# Altium PCB 多通道.PcbDoc (part 2 of 4)
Units mm, origin at the board's own origin, x right, y up, seen from the top; angles counter-clockwise.
Board outline 145 x 32 mm, 2 copper layers (Top Layer, Bottom Layer); 175 components, 157 nets, 554 pads, 195 vias.
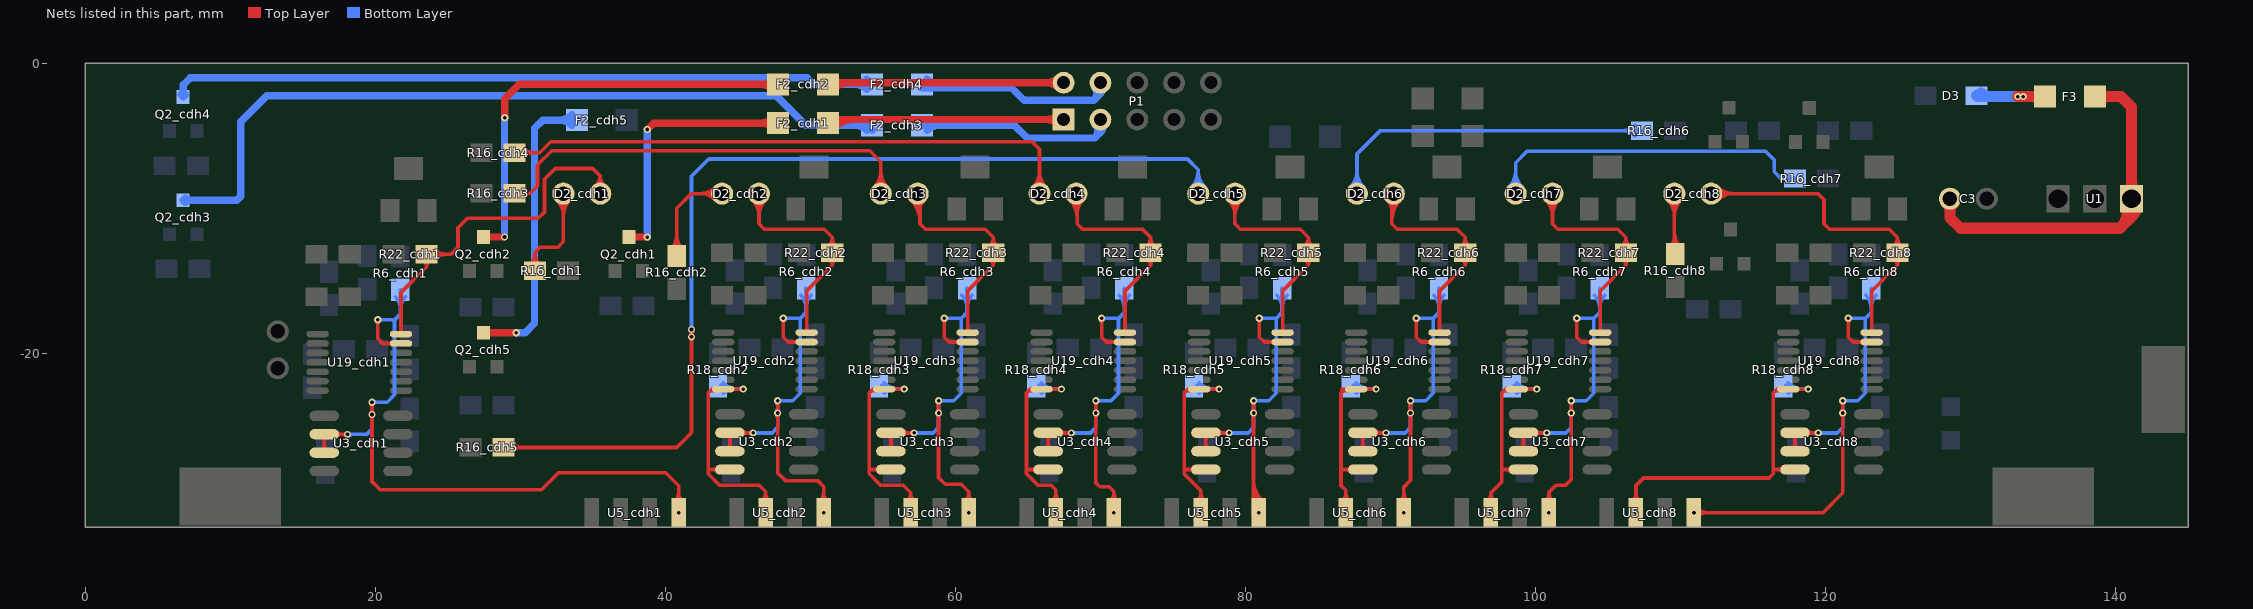
[diagram p2: the nets of this part, all layers, seen from the top]

## Via types
v1: diameter 0.5, hole 0.25, Top Layer to Bottom Layer, 192 vias
v2: diameter 3.1, hole 3.1, Top Layer to Bottom Layer, 3 vias

## Nets (pads, with @x,y where several pads share a name; then routed paths per layer and width w, separated by ;. In a path a pad name is that pad's centre, name@x,y a point inside that pad or via, vN(x,y) a via of type N, cw(c..) or ccw(c..) an arc to the next point about the centre after c; other vN are vias at no path point) (continued)
H1_OUT2_cdh2: R18_cdh2.1 U3_cdh2.4 U5_cdh2.2 U19_cdh2.7 | length 24.6
  Top Layer w0.254: 43.036,-28.016 U3_cdh2.4@44.451,-28.016 ; U19_cdh2.7@43.369,-22.542 ccw(c43.202,-22.71) 43.202,-22.473 ccw(c43.202,-22.237) U19_cdh2.7@43.369,-22.404 ; U19_cdh2.7@43.423,-22.57 ccw(c43.335,-23.108) 42.949,-22.723 ; U3_cdh2.4@43.629,-28.178 ccw(c43.238,-28.568) 43.238,-28.016 ccw(c43.238,-27.464) U3_cdh2.4@43.629,-27.855 ; U19_cdh2.7@44.608,-22.542 cw(c44.775,-22.71) 44.775,-22.473 cw(c44.775,-22.237) U19_cdh2.7@44.608,-22.404 ; 45.054,-22.473 ccw(c45.054,-22.161) v1@45.275,-22.382 ; 45.076,-22.473 cw(c45.076,-22.754) v1@45.275,-22.556 ; v1(45.362,-22.469) 45.358,-22.473 U19_cdh2.7@43.989,-22.473 43.199,-22.473 42.949,-22.723 ; U5_cdh2.2@46.653,-30.224 ccw(c46.016,-29.587) 46.917,-29.587 ccw(c47.817,-29.587) U5_cdh2.2@47.181,-30.224 ; U5_cdh2.2@46.83,-30.901 ccw(c46.62,-30.691) 46.917,-30.691 ccw(c47.214,-30.691) U5_cdh2.2@47.004,-30.901 ; v1(46.917,-30.988) 46.917,-29.55 46.466,-29.099 43.738,-29.099 42.949,-28.311 42.949,-22.723
  Bottom Layer w0.254: R18_cdh2.1@43.81,-22.223 ccw(c44.403,-21.631) 44.403,-22.469 ; R18_cdh2.1@43.99,-22.762 cw(c44.698,-23.47) 44.698,-22.469 ; R18_cdh2.1@43.99,-22.044 ccw(c45.016,-21.018) 45.016,-22.469 ; R18_cdh2.1@44.085,-22.63 cw(c44.346,-22.76) 44.346,-22.469 ; R18_cdh2.1@44.127,-22.293 ccw(c44.346,-22.244) 44.346,-22.469 ; v1@45.275,-22.556 ccw(c45.065,-22.766) 45.065,-22.469 ccw(c45.065,-22.172) v1@45.275,-22.382 ; v1(45.362,-22.469) 44.346,-22.469
H1_OUT2_cdh3: R18_cdh3.1 U3_cdh3.4 U5_cdh3.2 U19_cdh3.7 | length 23.4
  Top Layer w0.254: 54.136,-28.016 U3_cdh3.4@55.55,-28.016 ; U19_cdh3.7@54.469,-22.542 ccw(c54.302,-22.71) 54.302,-22.473 ccw(c54.302,-22.237) U19_cdh3.7@54.469,-22.404 ; U19_cdh3.7@54.523,-22.57 ccw(c54.435,-23.108) 54.049,-22.723 ; U3_cdh3.4@54.728,-28.178 ccw(c54.338,-28.568) 54.338,-28.016 ccw(c54.338,-27.464) U3_cdh3.4@54.728,-27.855 ; U19_cdh3.7@55.708,-22.542 cw(c55.875,-22.71) 55.875,-22.473 cw(c55.875,-22.237) U19_cdh3.7@55.708,-22.404 ; 56.154,-22.473 ccw(c56.154,-22.161) v1@56.375,-22.382 ; 56.176,-22.473 cw(c56.176,-22.754) v1@56.375,-22.556 ; v1(56.462,-22.469) 56.457,-22.473 U19_cdh3.7@55.088,-22.473 54.298,-22.473 54.049,-22.723 ; U5_cdh3.2@56.66,-30.218 ccw(c56.09,-29.618) 56.917,-29.618 ; U5_cdh3.2@56.83,-30.901 ccw(c56.62,-30.691) 56.917,-30.691 ccw(c57.214,-30.691) U5_cdh3.2@57.004,-30.901 ; v1(56.917,-30.988) 56.917,-29.618 ; U5_cdh3.2@57.174,-30.218 cw(c57.744,-29.618) 56.917,-29.618 ; 54.049,-22.723 54.049,-28.311 54.837,-29.099 56.398,-29.099 56.917,-29.618
  Bottom Layer w0.254: R18_cdh3.1@54.91,-22.223 ccw(c55.503,-21.631) 55.503,-22.469 ; R18_cdh3.1@55.09,-22.762 cw(c55.798,-23.47) 55.798,-22.469 ; R18_cdh3.1@55.09,-22.044 ccw(c56.116,-21.018) 56.116,-22.469 ; R18_cdh3.1@55.185,-22.63 cw(c55.446,-22.76) 55.446,-22.469 ; R18_cdh3.1@55.226,-22.293 ccw(c55.446,-22.244) 55.446,-22.469 ; v1@56.375,-22.556 ccw(c56.165,-22.766) 56.165,-22.469 ccw(c56.165,-22.172) v1@56.375,-22.382 ; v1(56.462,-22.469) 55.446,-22.469
H1_OUT2_cdh4: R18_cdh4.1 U3_cdh4.4 U5_cdh4.2 U19_cdh4.7 | length 22.7
  Top Layer w0.254: 64.981,-28.016 U3_cdh4.4@66.396,-28.016 ; U19_cdh4.7@65.315,-22.542 ccw(c65.148,-22.71) 65.148,-22.473 ccw(c65.148,-22.237) U19_cdh4.7@65.315,-22.404 ; U19_cdh4.7@65.368,-22.57 ccw(c65.281,-23.108) 64.895,-22.723 ; U3_cdh4.4@65.574,-28.178 ccw(c65.184,-28.568) 65.184,-28.016 ccw(c65.184,-27.464) U3_cdh4.4@65.574,-27.855 ; U19_cdh4.7@66.553,-22.542 cw(c66.721,-22.71) 66.721,-22.473 cw(c66.721,-22.237) U19_cdh4.7@66.553,-22.404 ; U5_cdh4.2@66.653,-30.224 ccw(c66.016,-29.587) 66.917,-29.587 ccw(c67.817,-29.587) U5_cdh4.2@67.181,-30.224 ; U5_cdh4.2@66.83,-30.901 ccw(c66.62,-30.691) 66.917,-30.691 ccw(c67.214,-30.691) U5_cdh4.2@67.004,-30.901 ; v1(66.917,-30.988) 66.917,-29.408 66.608,-29.099 65.683,-29.099 64.895,-28.311 64.895,-22.723 ; 67,-22.473 ccw(c67,-22.161) v1@67.221,-22.382 ; 67.022,-22.473 cw(c67.022,-22.754) v1@67.221,-22.556 ; v1(67.308,-22.469) 67.303,-22.473 U19_cdh4.7@65.934,-22.473 65.144,-22.473 64.895,-22.723
  Bottom Layer w0.254: R18_cdh4.1@65.756,-22.223 ccw(c66.348,-21.631) 66.348,-22.469 ; R18_cdh4.1@65.936,-22.762 cw(c66.644,-23.47) 66.644,-22.469 ; R18_cdh4.1@65.936,-22.044 ccw(c66.962,-21.018) 66.962,-22.469 ; R18_cdh4.1@66.031,-22.63 cw(c66.292,-22.76) 66.292,-22.469 ; R18_cdh4.1@66.072,-22.293 ccw(c66.292,-22.244) 66.292,-22.469 ; v1@67.221,-22.556 ccw(c67.011,-22.766) 67.011,-22.469 ccw(c67.011,-22.172) v1@67.221,-22.382 ; v1(67.308,-22.469) 66.292,-22.469
H1_OUT2_cdh5: R18_cdh5.1 U3_cdh5.4 U5_cdh5.2 U19_cdh5.7 | length 21.8
  Top Layer w0.254: 75.853,-28.016 U3_cdh5.4@77.267,-28.016 ; U19_cdh5.7@76.186,-22.542 ccw(c76.019,-22.71) 76.019,-22.473 ccw(c76.019,-22.237) U19_cdh5.7@76.186,-22.404 ; U19_cdh5.7@76.24,-22.57 ccw(c76.152,-23.108) 75.766,-22.723 ; U3_cdh5.4@76.445,-28.178 ccw(c76.055,-28.568) 76.055,-28.016 ccw(c76.055,-27.464) U3_cdh5.4@76.445,-27.855 ; U5_cdh5.2@76.653,-30.224 ccw(c76.017,-29.587) 76.917,-29.587 ccw(c77.817,-29.587) U5_cdh5.2@77.181,-30.224 ; U5_cdh5.2@76.83,-30.901 ccw(c76.62,-30.691) 76.917,-30.691 ccw(c77.214,-30.691) U5_cdh5.2@77.004,-30.901 ; v1(76.917,-30.988) 76.917,-29.462 75.766,-28.311 75.766,-22.723 ; U19_cdh5.7@77.425,-22.542 cw(c77.592,-22.71) 77.592,-22.473 cw(c77.592,-22.237) U19_cdh5.7@77.425,-22.404 ; 77.871,-22.473 ccw(c77.871,-22.161) v1@78.092,-22.382 ; 77.893,-22.473 cw(c77.893,-22.754) v1@78.092,-22.556 ; v1(78.179,-22.469) 78.174,-22.473 U19_cdh5.7@76.805,-22.473 76.015,-22.473 75.766,-22.723
  Bottom Layer w0.254: R18_cdh5.1@76.627,-22.223 ccw(c77.22,-21.631) 77.22,-22.469 ; R18_cdh5.1@76.807,-22.762 cw(c77.515,-23.47) 77.515,-22.469 ; R18_cdh5.1@76.807,-22.044 ccw(c77.833,-21.018) 77.833,-22.469 ; R18_cdh5.1@76.902,-22.63 cw(c77.163,-22.76) 77.163,-22.469 ; R18_cdh5.1@76.943,-22.293 ccw(c77.163,-22.244) 77.163,-22.469 ; v1@78.092,-22.556 ccw(c77.882,-22.766) 77.882,-22.469 ccw(c77.882,-22.172) v1@78.092,-22.382 ; v1(78.179,-22.469) 77.163,-22.469
H1_OUT2_cdh6: R18_cdh6.1 U3_cdh6.4 U5_cdh6.2 U19_cdh6.7 | length 22.4
  Top Layer w0.254: 86.639,-22.473 86.836,-22.473 ; U5_cdh6.2@86.653,-30.224 ccw(c86.016,-29.587) 86.917,-29.587 ccw(c87.817,-29.587) U5_cdh6.2@87.181,-30.224 ; 86.673,-28.016 U3_cdh6.4@88.088,-28.016 ; U5_cdh6.2@86.83,-30.901 ccw(c86.62,-30.691) 86.917,-30.691 ccw(c87.214,-30.691) U5_cdh6.2@87.004,-30.901 ; v1(86.917,-30.988) 86.917,-29.443 86.586,-29.113 86.586,-22.723 ; U19_cdh6.7@87.06,-22.57 ccw(c86.972,-23.108) 86.586,-22.723 ; U3_cdh6.4@87.266,-28.178 ccw(c86.876,-28.568) 86.876,-28.016 ccw(c86.876,-27.464) U3_cdh6.4@87.266,-27.855 ; U19_cdh6.7@88.245,-22.542 cw(c88.412,-22.71) 88.412,-22.473 cw(c88.412,-22.237) U19_cdh6.7@88.245,-22.404 ; 88.691,-22.473 ccw(c88.691,-22.161) v1@88.912,-22.382 ; 88.714,-22.473 cw(c88.714,-22.754) v1@88.912,-22.556 ; v1(88.999,-22.469) 88.995,-22.473 U19_cdh6.7@87.626,-22.473 86.836,-22.473 ; 86.586,-22.723 86.836,-22.473 ; 86.839,-22.473 cw(c86.839,-22.71) U19_cdh6.7@87.007,-22.542 ; 86.839,-22.473 ccw(c86.839,-22.237) U19_cdh6.7@87.007,-22.404 ; 86.839,-22.473 cw(c86.839,-22.71) U19_cdh6.7@87.007,-22.542 ; 86.839,-22.473 ccw(c86.839,-22.237) U19_cdh6.7@87.007,-22.404 ; 86.839,-22.473 cw(c86.839,-22.71) U19_cdh6.7@87.007,-22.542 ; 86.839,-22.473 ccw(c86.839,-22.237) U19_cdh6.7@87.007,-22.404
  Bottom Layer w0.254: R18_cdh6.1@87.448,-22.223 ccw(c88.04,-21.631) 88.04,-22.469 ; R18_cdh6.1@87.627,-22.762 cw(c88.336,-23.47) 88.336,-22.469 ; R18_cdh6.1@87.627,-22.044 ccw(c88.653,-21.018) 88.653,-22.469 ; R18_cdh6.1@87.722,-22.63 cw(c87.983,-22.76) 87.983,-22.469 ; R18_cdh6.1@87.764,-22.293 ccw(c87.983,-22.244) 87.983,-22.469 ; v1@88.912,-22.556 ccw(c88.702,-22.766) 88.702,-22.469 ccw(c88.702,-22.172) v1@88.912,-22.382 ; v1(88.999,-22.469) 87.983,-22.469
H1_OUT2_cdh7: R18_cdh7.1 U3_cdh7.4 U5_cdh7.2 U19_cdh7.7 | length 21.6
  Top Layer w0.254: U5_cdh7.2@96.66,-30.218 ccw(c96.092,-29.619) 96.917,-29.619 ; U5_cdh7.2@96.83,-30.901 ccw(c96.62,-30.691) 96.917,-30.691 ccw(c97.214,-30.691) U5_cdh7.2@97.004,-30.901 ; v1(96.917,-30.988) 96.917,-29.619 ; U5_cdh7.2@97.174,-30.218 cw(c97.742,-29.619) 96.917,-29.619 ; 97.747,-28.016 U3_cdh7.4@99.162,-28.016 ; U19_cdh7.7@98.081,-22.542 ccw(c97.914,-22.71) 97.914,-22.473 ccw(c97.914,-22.237) U19_cdh7.7@98.081,-22.404 ; U19_cdh7.7@98.134,-22.57 ccw(c98.047,-23.108) 97.661,-22.723 ; U3_cdh7.4@98.34,-28.178 ccw(c97.95,-28.568) 97.95,-28.016 ccw(c97.95,-27.464) U3_cdh7.4@98.34,-27.855 ; U19_cdh7.7@99.319,-22.542 cw(c99.487,-22.71) 99.487,-22.473 cw(c99.487,-22.237) U19_cdh7.7@99.319,-22.404 ; 99.766,-22.473 ccw(c99.766,-22.161) v1@99.987,-22.382 ; 99.788,-22.473 cw(c99.788,-22.754) v1@99.987,-22.556 ; v1(100.074,-22.469) 100.069,-22.473 U19_cdh7.7@98.7,-22.473 97.91,-22.473 97.661,-22.723 ; 96.917,-29.619 97.661,-28.876 97.661,-28.311 97.661,-22.723
  Bottom Layer w0.254: R18_cdh7.1@98.522,-22.223 ccw(c99.114,-21.631) 99.114,-22.469 ; R18_cdh7.1@98.702,-22.762 cw(c99.41,-23.47) 99.41,-22.469 ; R18_cdh7.1@98.702,-22.044 ccw(c99.728,-21.018) 99.728,-22.469 ; R18_cdh7.1@98.797,-22.63 cw(c99.058,-22.76) 99.058,-22.469 ; R18_cdh7.1@98.838,-22.293 ccw(c99.058,-22.244) 99.058,-22.469 ; v1@99.987,-22.556 ccw(c99.777,-22.766) 99.777,-22.469 ccw(c99.777,-22.172) v1@99.987,-22.382 ; v1(100.074,-22.469) 99.058,-22.469
H1_OUT2_cdh8: R18_cdh8.1 U3_cdh8.4 U5_cdh8.2 U19_cdh8.7 | length 30.4
  Top Layer w0.254: U5_cdh8.2@106.653,-30.224 ccw(c106.016,-29.587) 106.917,-29.587 ccw(c107.817,-29.587) U5_cdh8.2@107.181,-30.224 ; U5_cdh8.2@106.83,-30.901 ccw(c106.62,-30.691) 106.917,-30.691 ccw(c107.214,-30.691) U5_cdh8.2@107.004,-30.901 ; v1(106.917,-30.988) 106.917,-29.119 107.436,-28.6 116.091,-28.6 116.381,-28.311 116.381,-22.723 ; 116.467,-28.016 U3_cdh8.4@117.882,-28.016 ; U19_cdh8.7@116.801,-22.542 ccw(c116.633,-22.71) 116.633,-22.473 ccw(c116.633,-22.237) U19_cdh8.7@116.801,-22.404 ; U19_cdh8.7@116.854,-22.57 ccw(c116.766,-23.108) 116.381,-22.723 ; U3_cdh8.4@117.06,-28.178 ccw(c116.67,-28.568) 116.67,-28.016 ccw(c116.67,-27.464) U3_cdh8.4@117.06,-27.855 ; U19_cdh8.7@118.039,-22.542 cw(c118.207,-22.71) 118.207,-22.473 cw(c118.207,-22.237) U19_cdh8.7@118.039,-22.404 ; 118.486,-22.473 ccw(c118.486,-22.161) v1@118.707,-22.382 ; 118.508,-22.473 cw(c118.508,-22.754) v1@118.707,-22.556 ; v1(118.794,-22.469) 118.789,-22.473 U19_cdh8.7@117.42,-22.473 116.63,-22.473 116.381,-22.723
  Bottom Layer w0.254: R18_cdh8.1@117.242,-22.223 ccw(c117.834,-21.631) 117.834,-22.469 ; R18_cdh8.1@117.421,-22.762 cw(c118.13,-23.47) 118.13,-22.469 ; R18_cdh8.1@117.421,-22.044 ccw(c118.447,-21.018) 118.447,-22.469 ; R18_cdh8.1@117.517,-22.63 cw(c117.778,-22.76) 117.778,-22.469 ; R18_cdh8.1@117.558,-22.293 ccw(c117.778,-22.244) 117.778,-22.469 ; v1@118.707,-22.556 ccw(c118.497,-22.766) 118.497,-22.469 ccw(c118.497,-22.172) v1@118.707,-22.382 ; v1(118.794,-22.469) 117.778,-22.469
H1_OUT4_cdh1: R6_cdh1.1 U3_cdh1.2 U3_cdh1.3 U5_cdh1.4 U19_cdh1.13 | length 61.4
  Top Layer w0.254: U3_cdh1.3@16.324,-26.686 ccw(c15.933,-26.296) 16.485,-26.296 ccw(c17.037,-26.296) U3_cdh1.3@16.647,-26.686 ; U3_cdh1.2@16.324,-25.739 cw(c15.933,-26.13) 16.485,-26.13 cw(c17.037,-26.13) U3_cdh1.2@16.647,-25.739 ; U3_cdh1.3@16.485,-26.848 U3_cdh1.2@16.485,-25.578 16.5,-25.593 v1(18.083,-25.593) ; U3_cdh1.2@17.307,-25.739 cw(c17.661,-26.093) 17.661,-25.593 ; U3_cdh1.2@17.307,-25.416 ccw(c17.734,-24.99) 17.734,-25.593 ; v1@17.996,-25.68 ccw(c17.786,-25.89) 17.786,-25.593 ccw(c17.786,-25.296) v1@17.996,-25.506 ; v1@19.685,-24.308 cw(c19.475,-24.518) 19.772,-24.518 cw(c20.069,-24.518) v1@19.859,-24.308 ; v1@19.685,-24.134 ccw(c19.475,-23.924) 19.772,-23.924 ccw(c20.069,-23.924) v1@19.859,-24.134 ; v1@19.685,-23.457 cw(c19.475,-23.667) 19.772,-23.667 cw(c20.069,-23.667) v1@19.859,-23.457 ; v1(19.772,-23.37) v1(19.772,-24.221) 19.772,-28.465 19.772,-28.846 20.339,-29.413 31.466,-29.413 32.635,-28.245 40.024,-28.245 40.917,-29.138 v1(40.917,-30.988) ; v1@20.078,-17.78 cw(c19.868,-17.99) 20.165,-17.99 cw(c20.462,-17.99) v1@20.252,-17.78 ; v1(20.165,-17.693) 20.165,-18.989 20.501,-19.325 U19_cdh1.13@21.773,-19.325 ; U19_cdh1.13@21.154,-19.394 ccw(c20.987,-19.561) 20.987,-19.325 ccw(c20.987,-19.088) U19_cdh1.13@21.154,-19.256 ; U5_cdh1.4@40.653,-30.224 ccw(c40.016,-29.587) 40.917,-29.587 ccw(c41.817,-29.587) U5_cdh1.4@41.181,-30.224 ; U5_cdh1.4@40.83,-30.901 ccw(c40.62,-30.691) 40.917,-30.691 ccw(c41.214,-30.691) U5_cdh1.4@41.004,-30.901
  Bottom Layer w0.254: v1(18.083,-25.593) 19.403,-25.593 19.772,-25.224 v1(19.772,-24.221) v1(19.772,-23.37) 20.82,-23.37 21.33,-22.86 21.33,-17.704 ; v1@18.17,-25.68 cw(c18.38,-25.89) 18.38,-25.593 cw(c18.38,-25.296) v1@18.17,-25.506 ; v1@19.685,-24.308 cw(c19.475,-24.518) 19.772,-24.518 cw(c20.069,-24.518) v1@19.859,-24.308 ; v1@19.685,-24.134 ccw(c19.475,-23.924) 19.772,-23.924 ccw(c20.069,-23.924) v1@19.859,-24.134 ; v1@19.685,-23.457 cw(c19.475,-23.667) 19.772,-23.667 cw(c20.069,-23.667) 19.859,-23.457 cw(c20.069,-23.667) 20.069,-23.37 cw(c20.069,-23.073) v1@19.859,-23.283 ; v1(20.165,-17.693) 21.319,-17.693 21.33,-17.704 ; v1@20.252,-17.78 cw(c20.462,-17.99) 20.462,-17.693 cw(c20.462,-17.396) v1@20.252,-17.606 ; R6_cdh1.1@21.377,-16.107 cw(c20.51,-16.974) 21.736,-16.974 cw(c22.962,-16.974) R6_cdh1.1@22.095,-16.107 ; R6_cdh1.1@21.736,-15.621 21.736,-17.297 21.33,-17.704
H1_OUT4_cdh2: R6_cdh2.1 U3_cdh2.2 U3_cdh2.3 U5_cdh2.4 U19_cdh2.13 | length 42.2
  Top Layer w0.254: U3_cdh2.3@44.289,-26.585 ccw(c43.899,-26.194) 44.451,-26.194 ccw(c45.002,-26.194) U3_cdh2.3@44.612,-26.585 ; U3_cdh2.2@44.289,-25.638 cw(c43.899,-26.028) 44.451,-26.028 cw(c45.002,-26.028) U3_cdh2.2@44.612,-25.638 ; U3_cdh2.3@44.451,-26.746 U3_cdh2.2@44.451,-25.476 44.466,-25.491 v1(46.048,-25.491) ; U3_cdh2.2@45.273,-25.638 cw(c45.627,-25.992) 45.627,-25.491 ; U3_cdh2.2@45.273,-25.315 ccw(c45.699,-24.888) 45.699,-25.491 ; v1@45.961,-25.578 ccw(c45.751,-25.788) 45.751,-25.491 ccw(c45.751,-25.194) v1@45.961,-25.404 ; v1@47.651,-24.207 cw(c47.441,-24.417) 47.738,-24.417 cw(c48.035,-24.417) v1@47.825,-24.207 ; v1@47.651,-24.033 ccw(c47.441,-23.823) 47.738,-23.823 ccw(c48.035,-23.823) v1@47.825,-24.033 ; v1@47.651,-23.355 cw(c47.441,-23.565) 47.738,-23.565 cw(c48.035,-23.565) v1@47.825,-23.355 ; v1(47.738,-23.268) v1(47.738,-24.12) 47.738,-28.237 48.279,-28.778 50.489,-28.778 50.917,-29.206 v1(50.917,-30.988) ; v1@48.044,-17.679 cw(c47.834,-17.889) 48.131,-17.889 cw(c48.428,-17.889) v1@48.218,-17.679 ; v1(48.131,-17.592) 48.131,-18.887 48.467,-19.223 U19_cdh2.13@49.739,-19.223 ; U19_cdh2.13@49.119,-19.292 ccw(c48.952,-19.46) 48.952,-19.223 ccw(c48.952,-18.987) U19_cdh2.13@49.119,-19.154 ; U5_cdh2.4@50.653,-30.224 ccw(c50.016,-29.587) 50.917,-29.587 ccw(c51.817,-29.587) U5_cdh2.4@51.181,-30.224 ; U5_cdh2.4@50.83,-30.901 ccw(c50.62,-30.691) 50.917,-30.691 ccw(c51.214,-30.691) U5_cdh2.4@51.004,-30.901
  Bottom Layer w0.254: v1(46.048,-25.491) 47.369,-25.491 47.738,-25.122 v1(47.738,-24.12) v1(47.738,-23.268) 48.785,-23.268 49.295,-22.758 49.295,-17.602 ; v1@46.135,-25.578 cw(c46.345,-25.788) 46.345,-25.491 cw(c46.345,-25.194) v1@46.135,-25.404 ; v1@47.651,-24.207 cw(c47.441,-24.417) 47.738,-24.417 cw(c48.035,-24.417) v1@47.825,-24.207 ; v1@47.651,-24.033 ccw(c47.441,-23.823) 47.738,-23.823 ccw(c48.035,-23.823) v1@47.825,-24.033 ; v1@47.651,-23.355 cw(c47.441,-23.565) 47.738,-23.565 cw(c48.035,-23.565) 47.825,-23.355 cw(c48.035,-23.565) 48.035,-23.268 cw(c48.035,-22.971) v1@47.825,-23.181 ; v1(48.131,-17.592) 49.285,-17.592 49.295,-17.602 ; v1@48.218,-17.679 cw(c48.428,-17.889) 48.428,-17.592 cw(c48.428,-17.295) v1@48.218,-17.505 ; R6_cdh2.1@49.342,-16.006 cw(c48.475,-16.873) 49.701,-16.873 cw(c50.928,-16.873) R6_cdh2.1@50.061,-16.006 ; R6_cdh2.1@49.701,-15.519 49.701,-17.196 49.295,-17.602
H1_OUT4_cdh3: R6_cdh3.1 U3_cdh3.2 U3_cdh3.3 U5_cdh3.4 U19_cdh3.13 | length 41.1
  Top Layer w0.254: U3_cdh3.3@55.389,-26.585 ccw(c54.999,-26.194) 55.55,-26.194 ccw(c56.102,-26.194) U3_cdh3.3@55.712,-26.585 ; U3_cdh3.2@55.389,-25.638 cw(c54.999,-26.028) 55.55,-26.028 cw(c56.102,-26.028) U3_cdh3.2@55.712,-25.638 ; U3_cdh3.3@55.55,-26.746 U3_cdh3.2@55.55,-25.476 55.565,-25.491 v1(57.148,-25.491) ; U3_cdh3.2@56.372,-25.638 cw(c56.726,-25.992) 56.726,-25.491 ; U3_cdh3.2@56.372,-25.315 ccw(c56.799,-24.888) 56.799,-25.491 ; v1@57.061,-25.578 ccw(c56.851,-25.788) 56.851,-25.491 ccw(c56.851,-25.194) v1@57.061,-25.404 ; v1@58.75,-24.207 cw(c58.54,-24.417) 58.837,-24.417 cw(c59.134,-24.417) v1@58.924,-24.207 ; v1@58.75,-24.033 ccw(c58.54,-23.823) 58.837,-23.823 ccw(c59.134,-23.823) v1@58.924,-24.033 ; v1@58.75,-23.355 cw(c58.54,-23.565) 58.837,-23.565 cw(c59.134,-23.565) v1@58.924,-23.355 ; v1(58.837,-23.268) v1(58.837,-24.12) 58.837,-28.567 59.303,-29.032 60.395,-29.032 60.917,-29.554 v1(60.917,-30.988) ; v1@59.144,-17.679 cw(c58.934,-17.889) 59.231,-17.889 cw(c59.528,-17.889) v1@59.318,-17.679 ; v1(59.231,-17.592) 59.231,-18.887 59.567,-19.223 U19_cdh3.13@60.838,-19.223 ; U19_cdh3.13@60.219,-19.292 ccw(c60.052,-19.46) 60.052,-19.223 ccw(c60.052,-18.987) U19_cdh3.13@60.219,-19.154 ; U5_cdh3.4@60.653,-30.224 ccw(c60.016,-29.587) 60.917,-29.587 ccw(c61.817,-29.587) U5_cdh3.4@61.181,-30.224 ; U5_cdh3.4@60.83,-30.901 ccw(c60.62,-30.691) 60.917,-30.691 ccw(c61.214,-30.691) U5_cdh3.4@61.004,-30.901
  Bottom Layer w0.254: v1(57.148,-25.491) 58.469,-25.491 58.837,-25.122 v1(58.837,-24.12) v1(58.837,-23.268) 59.885,-23.268 60.395,-22.758 60.395,-17.602 ; v1@57.235,-25.578 cw(c57.445,-25.788) 57.445,-25.491 cw(c57.445,-25.194) v1@57.235,-25.404 ; v1@58.75,-24.207 cw(c58.54,-24.417) 58.837,-24.417 cw(c59.134,-24.417) v1@58.924,-24.207 ; v1@58.75,-24.033 ccw(c58.54,-23.823) 58.837,-23.823 ccw(c59.134,-23.823) v1@58.924,-24.033 ; v1@58.75,-23.355 cw(c58.54,-23.565) 58.837,-23.565 cw(c59.134,-23.565) 58.924,-23.355 cw(c59.134,-23.565) 59.134,-23.268 cw(c59.134,-22.971) v1@58.924,-23.181 ; v1(59.231,-17.592) 60.384,-17.592 60.395,-17.602 ; v1@59.318,-17.679 cw(c59.528,-17.889) 59.528,-17.592 cw(c59.528,-17.295) v1@59.318,-17.505 ; R6_cdh3.1@60.442,-16.006 cw(c59.575,-16.873) 60.801,-16.873 cw(c62.028,-16.873) R6_cdh3.1@61.16,-16.006 ; R6_cdh3.1@60.801,-15.519 60.801,-17.196 60.395,-17.602
H1_OUT4_cdh4: R6_cdh4.1 U3_cdh4.2 U3_cdh4.3 U5_cdh4.4 U19_cdh4.13 | length 40.5
  Top Layer w0.254: U3_cdh4.3@66.235,-26.585 ccw(c65.844,-26.194) 66.396,-26.194 ccw(c66.948,-26.194) U3_cdh4.3@66.558,-26.585 ; U3_cdh4.2@66.235,-25.638 cw(c65.844,-26.028) 66.396,-26.028 cw(c66.948,-26.028) U3_cdh4.2@66.558,-25.638 ; U3_cdh4.3@66.396,-26.746 U3_cdh4.2@66.396,-25.476 66.411,-25.491 v1(67.994,-25.491) ; U3_cdh4.2@67.218,-25.638 cw(c67.572,-25.992) 67.572,-25.491 ; U3_cdh4.2@67.218,-25.315 ccw(c67.645,-24.888) 67.645,-25.491 ; v1@67.907,-25.578 ccw(c67.697,-25.788) 67.697,-25.491 ccw(c67.697,-25.194) v1@67.907,-25.404 ; v1@69.596,-24.207 cw(c69.386,-24.417) 69.683,-24.417 cw(c69.98,-24.417) v1@69.77,-24.207 ; v1@69.596,-24.033 ccw(c69.386,-23.823) 69.683,-23.823 ccw(c69.98,-23.823) v1@69.77,-24.033 ; v1@69.596,-23.355 cw(c69.386,-23.565) 69.683,-23.565 cw(c69.98,-23.565) v1@69.77,-23.355 ; v1(69.683,-23.268) v1(69.683,-24.12) 69.683,-28.948 69.945,-29.21 70.606,-29.21 70.917,-29.521 v1(70.917,-30.988) ; v1@69.989,-17.679 cw(c69.779,-17.889) 70.076,-17.889 cw(c70.373,-17.889) v1@70.163,-17.679 ; v1(70.076,-17.592) 70.076,-18.887 70.412,-19.223 U19_cdh4.13@71.684,-19.223 ; U5_cdh4.4@70.653,-30.224 ccw(c70.016,-29.587) 70.917,-29.587 ccw(c71.817,-29.587) U5_cdh4.4@71.181,-30.224 ; U5_cdh4.4@70.83,-30.901 ccw(c70.62,-30.691) 70.917,-30.691 ccw(c71.214,-30.691) U5_cdh4.4@71.004,-30.901 ; U19_cdh4.13@71.065,-19.292 ccw(c70.898,-19.46) 70.898,-19.223 ccw(c70.898,-18.987) U19_cdh4.13@71.065,-19.154
  Bottom Layer w0.254: v1(67.994,-25.491) 69.314,-25.491 69.683,-25.122 v1(69.683,-24.12) v1(69.683,-23.268) 70.731,-23.268 71.241,-22.758 71.241,-17.602 ; v1@68.081,-25.578 cw(c68.291,-25.788) 68.291,-25.491 cw(c68.291,-25.194) v1@68.081,-25.404 ; v1@69.596,-24.207 cw(c69.386,-24.417) 69.683,-24.417 cw(c69.98,-24.417) v1@69.77,-24.207 ; v1@69.596,-24.033 ccw(c69.386,-23.823) 69.683,-23.823 ccw(c69.98,-23.823) v1@69.77,-24.033 ; v1@69.596,-23.355 cw(c69.386,-23.565) 69.683,-23.565 cw(c69.98,-23.565) 69.77,-23.355 cw(c69.98,-23.565) 69.98,-23.268 cw(c69.98,-22.971) v1@69.77,-23.181 ; v1(70.076,-17.592) 71.23,-17.592 71.241,-17.602 ; v1@70.163,-17.679 cw(c70.373,-17.889) 70.373,-17.592 cw(c70.373,-17.295) v1@70.163,-17.505 ; R6_cdh4.1@71.288,-16.006 cw(c70.421,-16.873) 71.647,-16.873 cw(c72.873,-16.873) R6_cdh4.1@72.006,-16.006 ; R6_cdh4.1@71.647,-15.519 71.647,-17.196 71.241,-17.602
H1_OUT4_cdh5: R6_cdh5.1 U3_cdh5.2 U3_cdh5.3 U5_cdh5.4 U19_cdh5.13 | length 43.3
  Top Layer w0.254: U3_cdh5.3@77.106,-26.585 ccw(c76.716,-26.194) 77.267,-26.194 ccw(c77.819,-26.194) U3_cdh5.3@77.429,-26.585 ; U3_cdh5.2@77.106,-25.638 cw(c76.716,-26.028) 77.267,-26.028 cw(c77.819,-26.028) U3_cdh5.2@77.429,-25.638 ; U3_cdh5.3@77.267,-26.746 U3_cdh5.2@77.267,-25.476 77.282,-25.491 v1(78.865,-25.491) ; U3_cdh5.2@78.089,-25.638 cw(c78.443,-25.992) 78.443,-25.491 ; U3_cdh5.2@78.089,-25.315 ccw(c78.516,-24.888) 78.516,-25.491 ; v1@78.778,-25.578 ccw(c78.568,-25.788) 78.568,-25.491 ccw(c78.568,-25.194) v1@78.778,-25.404 ; v1@80.467,-24.207 cw(c80.257,-24.417) 80.554,-24.417 cw(c80.851,-24.417) v1@80.641,-24.207 ; v1@80.467,-24.033 ccw(c80.257,-23.823) 80.554,-23.823 ccw(c80.851,-23.823) v1@80.641,-24.033 ; v1@80.467,-23.355 cw(c80.257,-23.565) 80.554,-23.565 cw(c80.851,-23.565) v1@80.641,-23.355 ; U5_cdh5.4@80.554,-31.079 v1(80.554,-24.12) v1(80.554,-23.268) ; U5_cdh5.4@80.554,-30.429 ccw(c81.476,-30.429) U5_cdh5.4@80.824,-31.081 ; 80.554,-29.939 ccw(c81.466,-29.939) U5_cdh5.4@80.822,-30.583 ; 80.554,-29.816 ccw(c82.089,-29.816) U5_cdh5.4@81.004,-30.901 ; 80.554,-29.325 ccw(c82.08,-29.325) U5_cdh5.4@81.001,-30.404 ; 80.554,-28.712 ccw(c82.693,-28.712) U5_cdh5.4@81.181,-30.224 ; v1@80.861,-17.679 cw(c80.651,-17.889) 80.948,-17.889 cw(c81.245,-17.889) v1@81.035,-17.679 ; v1(80.948,-17.592) 80.948,-18.887 81.284,-19.223 U19_cdh5.13@82.555,-19.223 ; U19_cdh5.13@81.936,-19.292 ccw(c81.769,-19.46) 81.769,-19.223 ccw(c81.769,-18.987) U19_cdh5.13@81.936,-19.154
  Bottom Layer w0.254: v1(78.865,-25.491) 80.186,-25.491 80.554,-25.122 v1(80.554,-24.12) v1(80.554,-23.268) 81.602,-23.268 82.112,-22.758 82.112,-17.602 ; v1@78.952,-25.578 cw(c79.162,-25.788) 79.162,-25.491 cw(c79.162,-25.194) v1@78.952,-25.404 ; v1@80.467,-24.207 cw(c80.257,-24.417) 80.554,-24.417 cw(c80.851,-24.417) v1@80.641,-24.207 ; v1@80.467,-24.033 ccw(c80.257,-23.823) 80.554,-23.823 ccw(c80.851,-23.823) v1@80.641,-24.033 ; v1@80.467,-23.355 cw(c80.257,-23.565) 80.554,-23.565 cw(c80.851,-23.565) 80.641,-23.355 cw(c80.851,-23.565) 80.851,-23.268 cw(c80.851,-22.971) v1@80.641,-23.181 ; v1(80.948,-17.592) 82.101,-17.592 82.112,-17.602 ; v1@81.035,-17.679 cw(c81.245,-17.889) 81.245,-17.592 cw(c81.245,-17.295) v1@81.035,-17.505 ; R6_cdh5.1@82.159,-16.006 cw(c81.292,-16.873) 82.518,-16.873 cw(c83.745,-16.873) R6_cdh5.1@82.877,-16.006 ; R6_cdh5.1@82.518,-15.519 82.518,-17.196 82.112,-17.602
  other v1: 80.917,-30.988
H1_OUT4_cdh6: R6_cdh6.1 U3_cdh6.2 U3_cdh6.3 U5_cdh6.4 U19_cdh6.13 | length 39.8
  Top Layer w0.254: U3_cdh6.3@87.926,-26.585 ccw(c87.536,-26.194) 88.088,-26.194 ccw(c88.64,-26.194) U3_cdh6.3@88.249,-26.585 ; U3_cdh6.2@87.926,-25.638 cw(c87.536,-26.028) 88.088,-26.028 cw(c88.64,-26.028) U3_cdh6.2@88.249,-25.638 ; U3_cdh6.3@88.088,-26.746 U3_cdh6.2@88.088,-25.476 88.103,-25.491 v1(89.685,-25.491) ; U3_cdh6.2@88.91,-25.638 cw(c89.264,-25.992) 89.264,-25.491 ; U3_cdh6.2@88.91,-25.315 ccw(c89.336,-24.888) 89.336,-25.491 ; v1@89.598,-25.578 ccw(c89.388,-25.788) 89.388,-25.491 ccw(c89.388,-25.194) v1@89.598,-25.404 ; U5_cdh6.4@90.653,-30.224 ccw(c90.016,-29.587) 90.917,-29.587 ccw(c91.817,-29.587) U5_cdh6.4@91.181,-30.224 ; U5_cdh6.4@90.83,-30.901 ccw(c90.62,-30.691) 90.917,-30.691 ccw(c91.214,-30.691) U5_cdh6.4@91.004,-30.901 ; v1(90.917,-30.988) 90.917,-29.219 91.375,-28.761 v1(91.375,-24.12) v1(91.375,-23.268) ; v1@91.288,-24.207 cw(c91.078,-24.417) 91.375,-24.417 cw(c91.672,-24.417) v1@91.462,-24.207 ; v1@91.288,-24.033 ccw(c91.078,-23.823) 91.375,-23.823 ccw(c91.672,-23.823) v1@91.462,-24.033 ; v1@91.288,-23.355 cw(c91.078,-23.565) 91.375,-23.565 cw(c91.672,-23.565) v1@91.462,-23.355 ; v1@91.681,-17.679 cw(c91.471,-17.889) 91.768,-17.889 cw(c92.065,-17.889) v1@91.855,-17.679 ; v1(91.768,-17.592) 91.768,-18.887 92.104,-19.223 U19_cdh6.13@93.376,-19.223 ; U19_cdh6.13@92.757,-19.292 ccw(c92.589,-19.46) 92.589,-19.223 ccw(c92.589,-18.987) U19_cdh6.13@92.757,-19.154
  Bottom Layer w0.254: v1(89.685,-25.491) 91.006,-25.491 91.375,-25.122 v1(91.375,-24.12) v1(91.375,-23.268) 92.422,-23.268 92.932,-22.758 92.932,-17.602 ; v1@89.772,-25.578 cw(c89.982,-25.788) 89.982,-25.491 cw(c89.982,-25.194) v1@89.772,-25.404 ; v1@91.288,-24.207 cw(c91.078,-24.417) 91.375,-24.417 cw(c91.672,-24.417) v1@91.462,-24.207 ; v1@91.288,-24.033 ccw(c91.078,-23.823) 91.375,-23.823 ccw(c91.672,-23.823) v1@91.462,-24.033 ; v1@91.288,-23.355 cw(c91.078,-23.565) 91.375,-23.565 cw(c91.672,-23.565) 91.462,-23.355 cw(c91.672,-23.565) 91.672,-23.268 cw(c91.672,-22.971) v1@91.462,-23.181 ; v1(91.768,-17.592) 92.922,-17.592 92.932,-17.602 ; v1@91.855,-17.679 cw(c92.065,-17.889) 92.065,-17.592 cw(c92.065,-17.295) v1@91.855,-17.505 ; R6_cdh6.1@92.979,-16.006 cw(c92.112,-16.873) 93.339,-16.873 cw(c94.565,-16.873) R6_cdh6.1@93.698,-16.006 ; R6_cdh6.1@93.339,-15.519 93.339,-17.196 92.932,-17.602
H1_OUT4_cdh7: R6_cdh7.1 U3_cdh7.2 U3_cdh7.3 U5_cdh7.4 U19_cdh7.13 | length 40.6
  Top Layer w0.254: U3_cdh7.3@99.001,-26.585 ccw(c98.61,-26.194) 99.162,-26.194 ccw(c99.714,-26.194) U3_cdh7.3@99.324,-26.585 ; U3_cdh7.2@99.001,-25.638 cw(c98.61,-26.028) 99.162,-26.028 cw(c99.714,-26.028) U3_cdh7.2@99.324,-25.638 ; U3_cdh7.3@99.162,-26.746 U3_cdh7.2@99.162,-25.476 99.177,-25.491 v1(100.76,-25.491) ; U3_cdh7.2@99.984,-25.638 cw(c100.338,-25.992) 100.338,-25.491 ; U3_cdh7.2@99.984,-25.315 ccw(c100.411,-24.888) 100.411,-25.491 ; U5_cdh7.4@100.653,-30.224 ccw(c100.016,-29.587) 100.917,-29.587 ccw(c101.817,-29.587) U5_cdh7.4@101.181,-30.224 ; v1@100.673,-25.578 ccw(c100.463,-25.788) 100.463,-25.491 ccw(c100.463,-25.194) v1@100.673,-25.404 ; U5_cdh7.4@100.83,-30.901 ccw(c100.62,-30.691) 100.917,-30.691 ccw(c101.214,-30.691) U5_cdh7.4@101.004,-30.901 ; v1(100.917,-30.988) 100.917,-29.582 101.39,-29.108 102.051,-29.108 102.449,-28.71 v1(102.449,-24.12) v1(102.449,-23.268) ; v1@102.362,-24.207 cw(c102.152,-24.417) 102.449,-24.417 cw(c102.746,-24.417) v1@102.536,-24.207 ; v1@102.362,-24.033 ccw(c102.152,-23.823) 102.449,-23.823 ccw(c102.746,-23.823) v1@102.536,-24.033 ; v1@102.362,-23.355 cw(c102.152,-23.565) 102.449,-23.565 cw(c102.746,-23.565) v1@102.536,-23.355 ; v1@102.755,-17.679 cw(c102.545,-17.889) 102.842,-17.889 cw(c103.139,-17.889) v1@102.929,-17.679 ; v1(102.842,-17.592) 102.842,-18.887 103.178,-19.223 U19_cdh7.13@104.45,-19.223 ; U19_cdh7.13@103.831,-19.292 ccw(c103.664,-19.46) 103.664,-19.223 ccw(c103.664,-18.987) U19_cdh7.13@103.831,-19.154
  Bottom Layer w0.254: v1(100.76,-25.491) 102.08,-25.491 102.449,-25.122 v1(102.449,-24.12) v1(102.449,-23.268) 103.497,-23.268 104.007,-22.758 104.007,-17.602 ; v1@100.847,-25.578 cw(c101.057,-25.788) 101.057,-25.491 cw(c101.057,-25.194) v1@100.847,-25.404 ; v1@102.362,-24.207 cw(c102.152,-24.417) 102.449,-24.417 cw(c102.746,-24.417) v1@102.536,-24.207 ; v1@102.362,-24.033 ccw(c102.152,-23.823) 102.449,-23.823 ccw(c102.746,-23.823) v1@102.536,-24.033 ; v1@102.362,-23.355 cw(c102.152,-23.565) 102.449,-23.565 cw(c102.746,-23.565) 102.536,-23.355 cw(c102.746,-23.565) 102.746,-23.268 cw(c102.746,-22.971) v1@102.536,-23.181 ; v1(102.842,-17.592) 103.996,-17.592 104.007,-17.602 ; v1@102.929,-17.679 cw(c103.139,-17.889) 103.139,-17.592 cw(c103.139,-17.295) v1@102.929,-17.505 ; R6_cdh7.1@104.054,-16.006 cw(c103.187,-16.873) 104.413,-16.873 cw(c105.639,-16.873) R6_cdh7.1@104.772,-16.006 ; R6_cdh7.1@104.413,-15.519 104.413,-17.196 104.007,-17.602
H1_OUT4_cdh8: R6_cdh8.1 U3_cdh8.2 U3_cdh8.3 U5_cdh8.4 U19_cdh8.13 | length 49
  Top Layer w0.254: v1(110.917,-30.988) 119.805,-30.988 121.169,-29.624 v1(121.169,-24.12) v1(121.169,-23.268) ; U5_cdh8.4@111.004,-31.075 cw(c111.214,-31.285) 111.214,-30.988 cw(c111.214,-30.691) U5_cdh8.4@111.004,-30.901 ; U5_cdh8.4@111.181,-31.252 cw(c111.817,-31.888) 111.817,-30.988 cw(c111.817,-30.088) U5_cdh8.4@111.181,-30.724 ; U3_cdh8.3@117.72,-26.585 ccw(c117.33,-26.194) 117.882,-26.194 ccw(c118.434,-26.194) U3_cdh8.3@118.044,-26.585 ; U3_cdh8.2@117.72,-25.638 cw(c117.33,-26.028) 117.882,-26.028 cw(c118.434,-26.028) U3_cdh8.2@118.044,-25.638 ; U3_cdh8.3@117.882,-26.746 U3_cdh8.2@117.882,-25.476 117.897,-25.491 v1(119.479,-25.491) ; U3_cdh8.2@118.704,-25.638 cw(c119.058,-25.992) 119.058,-25.491 ; U3_cdh8.2@118.704,-25.315 ccw(c119.13,-24.888) 119.13,-25.491 ; v1@119.392,-25.578 ccw(c119.182,-25.788) 119.182,-25.491 ccw(c119.182,-25.194) v1@119.392,-25.404 ; v1@121.082,-24.207 cw(c120.872,-24.417) 121.169,-24.417 cw(c121.466,-24.417) v1@121.256,-24.207 ; v1@121.082,-24.033 ccw(c120.872,-23.823) 121.169,-23.823 ccw(c121.466,-23.823) v1@121.256,-24.033 ; v1@121.082,-23.355 cw(c120.872,-23.565) 121.169,-23.565 cw(c121.466,-23.565) v1@121.256,-23.355 ; v1@121.475,-17.679 cw(c121.265,-17.889) 121.562,-17.889 cw(c121.859,-17.889) v1@121.649,-17.679 ; v1(121.562,-17.592) 121.562,-18.887 121.898,-19.223 U19_cdh8.13@123.17,-19.223 ; U19_cdh8.13@122.551,-19.292 ccw(c122.383,-19.46) 122.383,-19.223 ccw(c122.383,-18.987) U19_cdh8.13@122.551,-19.154
  Bottom Layer w0.254: v1(119.479,-25.491) 120.8,-25.491 121.169,-25.122 v1(121.169,-24.12) v1(121.169,-23.268) 122.217,-23.268 122.726,-22.758 122.726,-17.602 ; v1@119.566,-25.578 cw(c119.776,-25.788) 119.776,-25.491 cw(c119.776,-25.194) v1@119.566,-25.404 ; v1@121.082,-24.207 cw(c120.872,-24.417) 121.169,-24.417 cw(c121.466,-24.417) v1@121.256,-24.207 ; v1@121.082,-24.033 ccw(c120.872,-23.823) 121.169,-23.823 ccw(c121.466,-23.823) v1@121.256,-24.033 ; v1@121.082,-23.355 cw(c120.872,-23.565) 121.169,-23.565 cw(c121.466,-23.565) 121.256,-23.355 cw(c121.466,-23.565) 121.466,-23.268 cw(c121.466,-22.971) v1@121.256,-23.181 ; v1(121.562,-17.592) 122.716,-17.592 122.726,-17.602 ; v1@121.649,-17.679 cw(c121.859,-17.889) 121.859,-17.592 cw(c121.859,-17.295) v1@121.649,-17.505 ; R6_cdh8.1@122.774,-16.006 cw(c121.906,-16.873) 123.133,-16.873 cw(c124.359,-16.873) R6_cdh8.1@123.492,-16.006 ; R6_cdh8.1@123.133,-15.519 123.133,-17.196 122.726,-17.602
NetC3_1: C3.1 F3.2 U1.1 | length 34.1
  Top Layer w0.762: C3.1@128.299,-9.617 cw(c127.649,-10.267) 128.568,-10.267 cw(c129.488,-10.267) C3.1@128.838,-9.617 ; C3.1@128.568,-9.347 128.568,-10.668 129.28,-11.379 140.303,-11.379 ; F3.2@138.556,-2.301 140.369,-2.301 141.091,-3.023 U1.1@141.091,-9.347 141.091,-10.592 140.303,-11.379 ; F3.2@138.826,-2.571 cw(c139.476,-3.221) 139.476,-2.301 cw(c139.476,-1.381) F3.2@138.826,-2.032 ; U1.1@140.696,-9.638 cw(c139.122,-10.198) 140.303,-11.379 ; U1.1@140.794,-9.793 cw(c140.079,-10.509) 141.091,-10.509 cw(c142.102,-10.509) U1.1@141.387,-9.793 ; U1.1@140.794,-8.901 ccw(c140.079,-8.186) 141.091,-8.186 ccw(c142.102,-8.186) U1.1@141.387,-8.901 ; 141.156,-10.527 ccw(c140.379,-9.75) U1.1@141.414,-9.382
NetD2_cdh1_1: D2_cdh1.1 R22_cdh1.2 U19_cdh1.14 | length 29.1
  Top Layer w0.254: U19_cdh1.14@21.704,-18.606 ccw(c21.537,-18.438) 21.773,-18.438 ccw(c22.01,-18.438) U19_cdh1.14@21.842,-18.606 ; U19_cdh1.14@21.773,-18.675 21.773,-15.806 23.544,-14.036 ; R22_cdh1.2@23.297,-13.616 cw(c23.064,-14.036) 23.544,-14.036 ; R22_cdh1.2@23.79,-13.616 ccw(c24.024,-14.036) 23.544,-14.036 ; R22_cdh1.2@24.03,-13.531 cw(c24.897,-14.399) 24.897,-13.172 cw(c24.897,-11.946) R22_cdh1.2@24.03,-12.813 ; D2_cdh1.1@35.146,-8.47 ccw(c34.665,-7.778) 35.508,-7.778 ; D2_cdh1.1@35.508,-8.992 35.508,-7.777 ; D2_cdh1.1@35.87,-8.47 cw(c36.351,-7.778) 35.508,-7.778 ; 23.544,-14.036 R22_cdh1.2@23.544,-13.172 25.226,-13.172 25.698,-12.7 25.698,-11.354 26.359,-10.693 31.236,-10.693 31.667,-10.262 31.667,-8.001 32.404,-7.264 34.995,-7.264 35.508,-7.777
NetD2_cdh1_2: D2_cdh1.2 R16_cdh1.1 | length 12.6
  Top Layer w0.254: R16_cdh1.1@30.648,-13.941 ccw(c29.781,-13.074) 31.007,-13.074 ccw(c32.233,-13.074) R16_cdh1.1@31.366,-13.941 ; R16_cdh1.1@31.007,-14.3 31.007,-13.03 31.337,-12.7 32.582,-12.7 32.968,-12.314 D2_cdh1.2@32.968,-8.992 ; D2_cdh1.2@32.519,-9.441 cw(c31.435,-10.525) 32.968,-10.525 cw(c34.501,-10.525) D2_cdh1.2@33.417,-9.441 ; D2_cdh1.2@32.698,-9.261 cw(c32.048,-9.911) 32.968,-9.911 cw(c33.888,-9.911) D2_cdh1.2@33.237,-9.261
NetD2_cdh2_1: D2_cdh2.1 R22_cdh2.2 U19_cdh2.14 | length 21.5
  Top Layer w0.254: D2_cdh2.1@46.001,-9.441 cw(c44.917,-10.525) 46.45,-10.525 cw(c47.983,-10.525) D2_cdh2.1@46.899,-9.441 ; D2_cdh2.1@46.181,-9.261 cw(c45.53,-9.911) 46.45,-9.911 cw(c47.37,-9.911) D2_cdh2.1@46.72,-9.261 ; D2_cdh2.1@46.45,-9.068 46.45,-11.074 46.821,-11.445 50.95,-11.445 51.509,-12.004 ; U19_cdh2.14@49.669,-18.504 ccw(c49.502,-18.337) 49.739,-18.337 ccw(c49.975,-18.337) U19_cdh2.14@49.808,-18.504 ; U19_cdh2.14@49.739,-18.573 49.739,-15.705 51.509,-13.934 ; R22_cdh2.2@51.189,-12.676 ccw(c50.643,-12.004) 51.509,-12.004 ; R22_cdh2.2@51.262,-13.515 cw(c51.029,-13.934) 51.509,-13.934 ; R22_cdh2.2@51.756,-13.515 ccw(c51.989,-13.934) 51.509,-13.934 ; R22_cdh2.2@51.829,-12.676 cw(c52.375,-12.004) 51.509,-12.004 ; 51.509,-13.934 R22_cdh2.2@51.509,-13.071 51.509,-12.004
NetD2_cdh2_2: D2_cdh2.2 R16_cdh2.1 | length 12.6
  Top Layer w0.254: R16_cdh2.1@40.427,-12.798 ccw(c39.56,-11.931) 40.786,-11.931 ccw(c42.012,-11.931) R16_cdh2.1@41.145,-12.798 ; R16_cdh2.1@40.786,-13.284 40.786,-10.008 41.802,-8.992 D2_cdh2.2@43.91,-8.992 ; D2_cdh2.2@43.461,-9.441 ccw(c42.377,-10.525) 42.377,-8.992 ccw(c42.377,-7.459) D2_cdh2.2@43.461,-8.543 ; D2_cdh2.2@43.641,-9.261 ccw(c42.99,-9.911) 42.99,-8.992 ccw(c42.99,-8.072) D2_cdh2.2@43.641,-8.722
NetD2_cdh3_1: D2_cdh3.1 R22_cdh3.2 U19_cdh3.14 | length 21.2
  Top Layer w0.254: D2_cdh3.1@56.944,-9.441 cw(c55.479,-10.905) 57.55,-10.905 ; D2_cdh3.1@57.123,-9.261 cw(c56.093,-10.292) 57.55,-10.292 ; 57.55,-10.144 cw(c58.545,-10.144) D2_cdh3.1@57.842,-9.441 ; D2_cdh3.1@57.55,-9.068 57.55,-11.074 57.921,-11.445 62.05,-11.445 62.609,-12.004 ; U19_cdh3.14@60.769,-18.504 ccw(c60.602,-18.337) 60.838,-18.337 ccw(c61.075,-18.337) U19_cdh3.14@60.908,-18.504 ; U19_cdh3.14@60.838,-18.573 60.838,-15.705 62.609,-13.934 ; R22_cdh3.2@62.289,-12.676 ccw(c61.743,-12.004) 62.609,-12.004 ; R22_cdh3.2@62.362,-13.515 cw(c62.129,-13.934) 62.609,-13.934 ; R22_cdh3.2@62.856,-13.515 ccw(c63.089,-13.934) 62.609,-13.934 ; R22_cdh3.2@62.929,-12.676 cw(c63.475,-12.004) 62.609,-12.004 ; 62.609,-13.934 R22_cdh3.2@62.609,-13.071 62.609,-12.004
NetD2_cdh3_2: D2_cdh3.2 R16_cdh3.1 | length 34.9
  Top Layer w0.254: R16_cdh3.1@29.61,-8.966 30.677,-8.966 ; R16_cdh3.1@30.162,-9.244 cw(c30.677,-9.581) 30.677,-8.966 ; R16_cdh3.1@30.162,-8.688 ccw(c30.677,-8.351) 30.677,-8.966 ; D2_cdh3.2@54.404,-8.543 ccw(c53.319,-7.459) 54.853,-7.459 ccw(c56.386,-7.459) D2_cdh3.2@55.302,-8.543 ; D2_cdh3.2@54.583,-8.722 ccw(c53.933,-8.072) 54.853,-8.072 ccw(c55.772,-8.072) D2_cdh3.2@55.122,-8.722 ; D2_cdh3.2@54.853,-8.992 54.853,-6.802 54.083,-6.033 32.163,-6.033 31.185,-7.01 31.185,-8.458 30.677,-8.966
NetD2_cdh4_1: D2_cdh4.1 R22_cdh4.2 U19_cdh4.14 | length 21.5
  Top Layer w0.254: D2_cdh4.1@67.886,-9.441 cw(c66.655,-10.672) 68.396,-10.672 ; D2_cdh4.1@68.065,-9.261 cw(c67.268,-10.059) 68.396,-10.059 ; 68.396,-10.377 cw(c69.721,-10.377) D2_cdh4.1@68.784,-9.441 ; 68.396,-9.764 cw(c69.107,-9.764) D2_cdh4.1@68.604,-9.261 ; D2_cdh4.1@68.396,-9.068 68.396,-11.074 68.766,-11.445 72.896,-11.445 73.455,-12.004 ; U19_cdh4.14@71.615,-18.504 ccw(c71.448,-18.337) 71.684,-18.337 ccw(c71.921,-18.337) U19_cdh4.14@71.753,-18.504 ; U19_cdh4.14@71.684,-18.573 71.684,-15.705 73.455,-13.934 ; R22_cdh4.2@73.134,-12.676 ccw(c72.589,-12.004) 73.455,-12.004 ; R22_cdh4.2@73.208,-13.515 cw(c72.975,-13.934) 73.455,-13.934 ; R22_cdh4.2@73.701,-13.515 ccw(c73.935,-13.934) 73.455,-13.934 ; R22_cdh4.2@73.775,-12.676 cw(c74.321,-12.004) 73.455,-12.004 ; 73.455,-13.934 R22_cdh4.2@73.455,-13.071 73.455,-12.004
NetD2_cdh4_2: D2_cdh4.2 R16_cdh4.1 | length 46.2
  Top Layer w0.254: R16_cdh4.1@30.067,-5.715 R16_cdh4.1@29.61,-6.172 31.337,-6.172 32.099,-5.41 65.272,-5.41 65.795,-5.933 D2_cdh4.2@65.795,-8.992 ; R16_cdh4.1@30.096,-6.531 cw(c30.963,-7.399) 30.963,-6.172 cw(c30.963,-4.946) R16_cdh4.1@30.096,-5.813 ; D2_cdh4.2@65.346,-8.543 ccw(c64.262,-7.459) 65.795,-7.459 ccw(c67.328,-7.459) D2_cdh4.2@66.244,-8.543 ; D2_cdh4.2@65.525,-8.722 ccw(c64.875,-8.072) 65.795,-8.072 ccw(c66.715,-8.072) D2_cdh4.2@66.064,-8.722
NetD2_cdh5_1: D2_cdh5.1 R22_cdh5.2 U19_cdh5.14 | length 21.5
  Top Layer w0.254: D2_cdh5.1@78.828,-9.441 cw(c77.769,-10.5) 79.267,-10.5 ; D2_cdh5.1@79.008,-9.261 cw(c78.382,-9.887) 79.267,-9.887 ; 79.267,-10.549 cw(c80.835,-10.549) D2_cdh5.1@79.726,-9.441 ; 79.267,-9.936 cw(c80.222,-9.936) D2_cdh5.1@79.547,-9.261 ; D2_cdh5.1@79.267,-9.068 79.267,-11.074 79.638,-11.445 83.767,-11.445 84.326,-12.004 ; U19_cdh5.14@82.486,-18.504 ccw(c82.319,-18.337) 82.555,-18.337 ccw(c82.792,-18.337) U19_cdh5.14@82.625,-18.504 ; U19_cdh5.14@82.555,-18.573 82.555,-15.705 84.326,-13.934 ; R22_cdh5.2@84.006,-12.676 ccw(c83.46,-12.004) 84.326,-12.004 ; R22_cdh5.2@84.079,-13.515 cw(c83.846,-13.934) 84.326,-13.934 ; R22_cdh5.2@84.573,-13.515 ccw(c84.806,-13.934) 84.326,-13.934 ; R22_cdh5.2@84.646,-12.676 cw(c85.192,-12.004) 84.326,-12.004 ; 84.326,-13.934 R22_cdh5.2@84.326,-13.071 84.326,-12.004
NetD2_cdh5_2: D2_cdh5.2 R16_cdh5.1 | length 76.5
  Top Layer w0.254: R16_cdh5.1@28.848,-26.492 40.786,-26.492 41.802,-25.476 v1(41.802,-18.872) v1(41.802,-18.364) ; R16_cdh5.1@29.334,-26.851 cw(c30.201,-27.719) 30.201,-26.492 cw(c30.201,-25.266) R16_cdh5.1@29.334,-26.133 ; v1@41.715,-18.959 cw(c41.505,-19.169) 41.802,-19.169 cw(c42.099,-19.169) v1@41.889,-18.959 ; v1@41.715,-18.785 ccw(c41.505,-18.575) 41.802,-18.575 ccw(c42.099,-18.575) v1@41.889,-18.785 ; v1@41.715,-18.451 cw(c41.505,-18.661) 41.802,-18.661 cw(c42.099,-18.661) v1@41.889,-18.451 ; v1@41.728,-18.463 cw(c41.632,-18.591) v1@41.787,-18.632 ; v1@41.817,-18.632 cw(c41.972,-18.591) v1@41.876,-18.463
  Bottom Layer w0.254: v1@41.715,-18.277 ccw(c41.505,-18.067) 41.802,-18.067 ccw(c42.099,-18.067) v1@41.889,-18.277 ; v1(41.802,-18.364) 41.802,-7.798 42.996,-6.604 75.99,-6.604 76.737,-7.351 D2_cdh5.2@76.737,-8.992 ; D2_cdh5.2@76.288,-8.543 ccw(c75.204,-7.459) 76.737,-7.459 ccw(c78.27,-7.459) D2_cdh5.2@77.186,-8.543 ; D2_cdh5.2@76.468,-8.722 ccw(c75.817,-8.072) 76.737,-8.072 ccw(c77.657,-8.072) D2_cdh5.2@77.007,-8.722
NetD2_cdh6_1: D2_cdh6.1 R22_cdh6.2 U19_cdh6.14 | length 21.2
  Top Layer w0.254: D2_cdh6.1@89.77,-9.441 cw(c89.005,-10.206) 90.087,-10.206 ; 90.087,-10.843 cw(c92.071,-10.843) D2_cdh6.1@90.668,-9.441 ; 90.087,-10.23 cw(c91.458,-10.23) D2_cdh6.1@90.489,-9.261 ; D2_cdh6.1@90.087,-9.068 90.087,-11.074 90.458,-11.445 94.587,-11.445 95.146,-12.004 ; U19_cdh6.14@93.307,-18.504 ccw(c93.139,-18.337) 93.376,-18.337 ccw(c93.612,-18.337) U19_cdh6.14@93.445,-18.504 ; U19_cdh6.14@93.376,-18.573 93.376,-15.705 95.146,-13.934 ; R22_cdh6.2@94.826,-12.676 ccw(c94.28,-12.004) 95.146,-12.004 ; R22_cdh6.2@94.899,-13.515 cw(c94.666,-13.934) 95.146,-13.934 ; R22_cdh6.2@95.393,-13.515 ccw(c95.626,-13.934) 95.146,-13.934 ; R22_cdh6.2@95.466,-12.676 cw(c96.012,-12.004) 95.146,-12.004 ; 95.146,-13.934 R22_cdh6.2@95.146,-13.071 95.146,-12.004
NetD2_cdh6_2: D2_cdh6.2 R16_cdh6.1 | length 28.8
  Bottom Layer w0.254: D2_cdh6.2@87.23,-8.543 ccw(c86.146,-7.459) 87.679,-7.459 ccw(c89.213,-7.459) D2_cdh6.2@88.128,-8.543 ; D2_cdh6.2@87.41,-8.722 ccw(c86.76,-8.072) 87.679,-8.072 ccw(c88.599,-8.072) D2_cdh6.2@87.949,-8.722 ; D2_cdh6.2@87.679,-8.992 87.679,-6.269 89.3,-4.648 R16_cdh6.1@107.334,-4.648 ; R16_cdh6.1@106.848,-5.007 ccw(c105.981,-5.875) 105.981,-4.648 ccw(c105.981,-3.422) R16_cdh6.1@106.848,-4.289
NetD2_cdh7_1: D2_cdh7.1 R22_cdh7.2 U19_cdh7.14 | length 21.5
  Top Layer w0.254: D2_cdh7.1@100.713,-9.441 cw(c99.629,-10.525) 101.162,-10.525 cw(c102.695,-10.525) D2_cdh7.1@101.611,-9.441 ; D2_cdh7.1@100.892,-9.261 cw(c100.242,-9.911) 101.162,-9.911 cw(c102.082,-9.911) D2_cdh7.1@101.431,-9.261 ; D2_cdh7.1@101.162,-9.068 101.162,-11.074 101.532,-11.445 105.662,-11.445 106.221,-12.004 ; U19_cdh7.14@104.381,-18.504 ccw(c104.214,-18.337) 104.45,-18.337 ccw(c104.687,-18.337) U19_cdh7.14@104.519,-18.504 ; U19_cdh7.14@104.45,-18.573 104.45,-15.705 106.221,-13.934 ; R22_cdh7.2@105.9,-12.676 ccw(c105.355,-12.004) 106.221,-12.004 ; R22_cdh7.2@105.974,-13.515 cw(c105.741,-13.934) 106.221,-13.934 ; R22_cdh7.2@106.467,-13.515 ccw(c106.701,-13.934) 106.221,-13.934 ; R22_cdh7.2@106.541,-12.676 cw(c107.087,-12.004) 106.221,-12.004 ; 106.221,-13.934 R22_cdh7.2@106.221,-13.071 106.221,-12.004
NetD2_cdh7_2: D2_cdh7.2 R16_cdh7.1 | length 27.8
  Bottom Layer w0.254: D2_cdh7.2@98.173,-8.543 ccw(c97.089,-7.459) 98.622,-7.459 ccw(c100.155,-7.459) D2_cdh7.2@99.071,-8.543 ; D2_cdh7.2@98.352,-8.722 ccw(c97.702,-8.072) 98.622,-8.072 ccw(c99.542,-8.072) D2_cdh7.2@98.891,-8.722 ; D2_cdh7.2@98.622,-8.992 98.622,-6.858 99.409,-6.071 115.843,-6.071 116.453,-6.68 116.453,-7.493 116.91,-7.95 ; R16_cdh7.1@117.298,-8.185 ccw(c116.91,-8.388) 116.91,-7.95 ; R16_cdh7.1@117.298,-7.715 cw(c116.91,-7.513) 116.91,-7.95 ; R16_cdh7.1@117.875,-7.95 116.91,-7.95
NetD2_cdh8_1: D2_cdh8.1 R22_cdh8.2 U19_cdh8.14 | length 29.1
  Top Layer w0.254: D2_cdh8.1@112.104,-8.992 119.45,-8.992 119.882,-9.423 119.882,-11.074 120.252,-11.445 124.382,-11.445 124.94,-12.004 ; D2_cdh8.1@112.374,-9.261 cw(c113.024,-9.911) 113.024,-8.992 cw(c113.024,-8.072) D2_cdh8.1@112.374,-8.722 ; D2_cdh8.1@112.553,-9.441 cw(c113.637,-10.525) 113.637,-8.992 cw(c113.637,-7.459) D2_cdh8.1@112.553,-8.543 ; U19_cdh8.14@123.101,-18.504 ccw(c122.933,-18.337) 123.17,-18.337 ccw(c123.407,-18.337) U19_cdh8.14@123.239,-18.504 ; U19_cdh8.14@123.17,-18.573 123.17,-15.705 124.94,-13.934 ; R22_cdh8.2@124.62,-12.676 ccw(c124.074,-12.004) 124.94,-12.004 ; R22_cdh8.2@124.694,-13.515 cw(c124.46,-13.934) 124.94,-13.934 ; R22_cdh8.2@125.187,-13.515 ccw(c125.42,-13.934) 124.94,-13.934 ; R22_cdh8.2@125.261,-12.676 cw(c125.806,-12.004) 124.94,-12.004 ; 124.94,-13.934 R22_cdh8.2@124.94,-13.071 124.94,-12.004
NetD2_cdh8_2: D2_cdh8.2 R16_cdh8.1 | length 10.6
  Top Layer w0.254: D2_cdh8.2@109.115,-9.441 cw(c108.031,-10.525) 109.564,-10.525 cw(c111.097,-10.525) D2_cdh8.2@110.013,-9.441 ; R16_cdh8.1@109.261,-12.671 ccw(c108.528,-11.939) 109.564,-11.939 ; D2_cdh8.2@109.295,-9.261 cw(c108.644,-9.911) 109.564,-9.911 cw(c110.484,-9.911) D2_cdh8.2@109.834,-9.261 ; 109.564,-12.282 ccw(c110.368,-12.282) R16_cdh8.1@109.8,-12.851 ; 109.564,-11.669 ccw(c110.981,-11.669) R16_cdh8.1@109.979,-12.671 ; D2_cdh8.2@109.564,-8.992 109.564,-13.101 R16_cdh8.1@109.62,-13.157
NetD3_2: D3.2 F3.1 | length 6.9
  Top Layer w0.762: v1(133.232,-2.301) v1(133.623,-2.301) F3.1@135.127,-2.301 ; F3.1@134.858,-2.571 ccw(c134.207,-3.221) 134.207,-2.301 ccw(c134.207,-1.381) F3.1@134.858,-2.032
  Bottom Layer w0.762: D3.2@130.392,-2.235 130.458,-2.301 v1(133.232,-2.301) ; D3.2@130.699,-2.056 ccw(c131.292,-1.463) 131.292,-2.301
NetF2_cdh1_1: F2_cdh1.1 Q2_cdh1.1 | length 20.6
  Top Layer w0.254: v1@38.747,-11.982 v1(38.754,-11.989)
  Top Layer w0.508: Q2_cdh1.1@37.484,-11.982 v1@38.747,-11.982 ; Q2_cdh1.1@37.623,-12.121 cw(c37.957,-12.455) 37.957,-11.982 cw(c37.957,-11.509) Q2_cdh1.1@37.623,-11.844 ; v1(38.754,-4.572) 39.196,-4.13 F2_cdh1.1@47.777,-4.13 ; F2_cdh1.1@47.417,-4.489 ccw(c46.55,-5.356) 46.55,-4.13 ccw(c46.55,-2.904) F2_cdh1.1@47.417,-3.771
  Bottom Layer w0.508: v1(38.754,-11.989) v1(38.754,-4.572)
NetF2_cdh1_2: F2_cdh1.2 P1.1 | length 19.8
  Top Layer w0.508: F2_cdh1.2@51.206,-4.13 51.449,-3.886 P1.1@67.456,-3.886 ; F2_cdh1.2@51.565,-4.489 cw(c53.021,-5.945) 53.021,-3.886 ; P1.1@67.105,-4.237 ccw(c66.259,-5.084) 66.259,-3.886 ccw(c66.259,-2.689) P1.1@67.105,-3.535
NetF2_cdh2_1: F2_cdh2.1 Q2_cdh2.1 | length 32.9
  Top Layer w0.508: Q2_cdh2.1@27.451,-11.982 v1(28.905,-11.982) ; Q2_cdh2.1@27.59,-12.121 cw(c27.924,-12.455) 27.924,-11.982 cw(c27.924,-11.509) Q2_cdh2.1@27.59,-11.844 ; v1(28.924,-3.759) 28.924,-2.464 29.925,-1.463 F2_cdh2.1@47.777,-1.463 ; F2_cdh2.1@47.417,-1.822 ccw(c46.55,-2.689) 46.55,-1.463 ccw(c46.55,-0.237) F2_cdh2.1@47.417,-1.104
  Bottom Layer w0.508: v1(28.905,-11.982) 28.905,-3.778 v1(28.924,-3.759)
NetF2_cdh2_2: F2_cdh2.2 P1.2 | length 20.1
  Top Layer w0.508: F2_cdh2.2@51.206,-1.463 51.322,-1.346 P1.2@67.456,-1.346 ; F2_cdh2.2@51.565,-1.822 cw(c52.714,-2.971) 52.714,-1.346 ; F2_cdh2.2@51.565,-1.104 ccw(c52.15,-0.519) 52.15,-1.346 ; P1.2@67.105,-1.697 ccw(c66.259,-2.544) 66.259,-1.346 ccw(c66.259,-0.149) P1.2@67.105,-0.995
NetF2_cdh3_1: F2_cdh3.1 Q2_cdh3.1 | length 57.2
  Bottom Layer w0.508: Q2_cdh3.1@6.75,-9.442 10.44,-9.442 10.719,-9.163 10.719,-4.032 12.516,-2.235 47.644,-2.235 49.676,-4.267 53.888,-4.267 F2_cdh3.1@54.254,-4.633 ; Q2_cdh3.1@6.889,-9.581 cw(c7.223,-9.915) 7.223,-9.442 cw(c7.223,-8.969) Q2_cdh3.1@6.889,-9.304 ; 53.002,-4.267 cw(c53.002,-5.528) F2_cdh3.1@53.894,-4.637 ; 53.052,-4.267 ccw(c53.052,-3.076) F2_cdh3.1@53.894,-3.918
NetF2_cdh3_2: F2_cdh3.2 P1.3 | length 18.8
  Bottom Layer w0.508: F2_cdh3.2@57.683,-4.277 64.063,-4.277 64.941,-5.156 69.615,-5.156 ; F2_cdh3.2@58.042,-4.637 cw(c58.909,-5.504) 58.909,-4.277 cw(c58.909,-3.051) F2_cdh3.2@58.042,-3.918 ; P1.3@69.632,-4.224 cw(c69.14,-4.681) 69.615,-5.156 ; P1.3@69.736,-4.308 cw(c69.447,-4.775) 69.996,-4.775 ; 69.988,-4.783 ccw(c69.526,-4.322) P1.3@70.005,-3.878 ; P1.3@69.996,-3.886 69.996,-4.775 ; P1.3@70.256,-4.308 ccw(c70.545,-4.775) 69.996,-4.775 ; 69.615,-5.156 69.996,-4.775
NetF2_cdh4_1: F2_cdh4.1 Q2_cdh4.1 | length 51.4
  Bottom Layer w0.508: Q2_cdh4.1@6.611,-2.167 ccw(c6.277,-1.832) 6.75,-1.832 ccw(c7.223,-1.832) Q2_cdh4.1@6.889,-2.167 ; Q2_cdh4.1@6.75,-2.33 6.75,-1.499 7.233,-1.016 49.803,-1.016 50.245,-1.458 F2_cdh4.1@54.254,-1.458 ; F2_cdh4.1@53.894,-1.817 ccw(c53.027,-2.684) 53.027,-1.458 ccw(c53.027,-0.232) F2_cdh4.1@53.894,-1.099
NetF2_cdh4_2: F2_cdh4.2 P1.4 | length 17.9
  Bottom Layer w0.508: F2_cdh4.2@57.683,-1.712 63.885,-1.712 64.726,-2.553 69.551,-2.553 ; F2_cdh4.2@58.042,-1.099 ccw(c59.522,0.382) 59.522,-1.712 ; P1.4@69.605,-1.652 cw(c69.069,-2.072) 69.551,-2.553 ; P1.4@69.795,-1.8 cw(c69.659,-2.108) 69.996,-2.108 ; 69.956,-2.148 ccw(c69.524,-1.716) P1.4@70.005,-1.339 ; P1.4@69.996,-1.346 69.996,-2.108 ; P1.4@70.197,-1.8 ccw(c70.333,-2.108) 69.996,-2.108 ; 69.551,-2.553 69.996,-2.108
NetF2_cdh5_1: F2_cdh5.1 Q2_cdh5.1 | length 23
  Top Layer w0.508: Q2_cdh5.1@27.451,-18.586 v1@29.661,-18.586 ; Q2_cdh5.1@27.59,-18.725 cw(c27.924,-19.059) 27.924,-18.586 cw(c27.924,-18.113) Q2_cdh5.1@27.59,-18.448
  Bottom Layer w0.508: v1(29.712,-18.586) 30.328,-18.586 30.982,-17.932 30.982,-4.496 31.556,-3.922 F2_cdh5.1@33.908,-3.922 ; F2_cdh5.1@33.549,-4.281 ccw(c32.682,-5.148) 32.682,-3.922 ccw(c32.682,-2.695) F2_cdh5.1@33.549,-3.563